# Altium PCB JacdacEdgeConnectorRef 101.PcbDoc
Units mm, origin at the board's own origin, x right, y up, seen from the top; angles counter-clockwise.
Board outline 11.95 x 12.12 mm, 2 copper layers (Top Layer, Bottom Layer), stack 1.901 mm thick; 1 components, 3 nets, 12 pads, 1 vias.
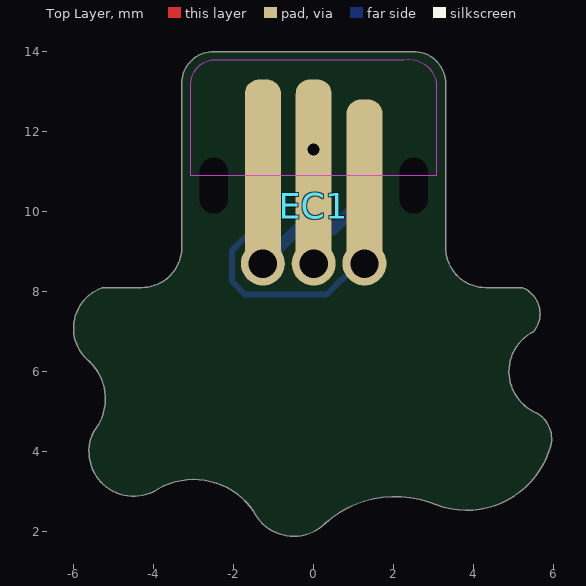
[diagram p0: Top Layer view]
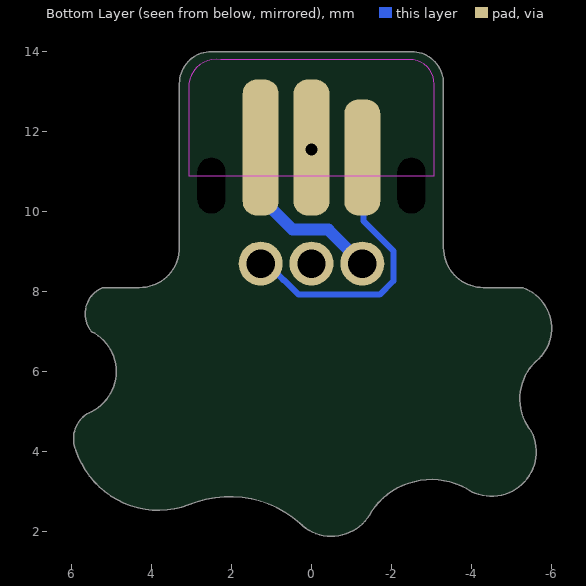
[diagram p1: Bottom Layer view, seen from below]

## Layer stack, top to bottom
Top Solder: solder mask 0.0102, Solder Resist, Dk 3.5
Top Layer: signal copper 0.0356
Dielectric 1: core 1.83, FR-4, Dk 4.2
Bottom Layer: signal copper 0.0356
Bottom Solder: solder mask 0.0102, Solder Resist, Dk 3.5

## Board outline
-5.5,4.5 ccw(c-6.498,5.318) -5.679,6.316 cw(c-4.933,7.083) -5.296,8.09 -5.3,8.1 -4.3,8.1 ccw(c-4.3,9.1) -3.3,9.1 -3.3,9.098 -3.3,13.2 cw(c-2.5,13.2) -2.5,14 2.5,14 cw(c2.5,13.2) 3.3,13.2 3.3,9.098 3.3,9.1 ccw(c4.3,9.1) 4.3,8.1 5.223,8.1 cw(c4.948,7.445) 5.501,6.999 5.5,7 ccw(c6,6) 5.5,5 cw(c5.213,4.323) 5.891,4.036 cw(c3.821,4.71) 3.071,2.667 ccw(c2.041,0.25) 0.291,2.209 cw(c-0.5,3) -1.5,2.5 ccw(c-3,1.5) -4,3 cw(c-4.5,4)

## Design rules (kind name [scope] priority, off if disabled: settings)
AssemblyTestPointUsage [All] p1: valid=2
BoardOutlineClearance [not (HasFootprint('MOUSEBITE_CONNECTOR_3X2') or HasFootprint('MOUSEBITE_NOCONNECTOR_3'))] p1: gap=0.3 ignorepadtopadclearanceinfootprint=FALSE except(0: Arc-SplitContinuation Track-SplitContinuation SMDPad-SplitContinuation THPad-SplitContinuation Via-SplitContinuation Fill-SplitContinuation Poly-SplitContinuation Text-OutlineEdge Text-CavityEdge Text-CutoutEdge Text-SplitBarrior Text-SplitContinuation; 0.15: Region-OutlineEdge Region-CavityEdge Region-CutoutEdge Region-SplitBarrior Region-SplitContinuation)
Clearance [not (IsPad and HasFootprint('MOUSEBITE_CONNECTOR_3X2'))] p1: gap=0.15 ignorepadtopadclearanceinfootprint=FALSE except(0.254: Arc-Hole Track-Hole SMDPad-Hole THPad-Hole Via-Hole Fill-Hole Poly-Hole Region-Hole Text-Hole)
ComponentClearance [All] p1: gap=0.01 collisioncheckmode=3 verticalgap=0.2 showdistances=FALSE
DiffPairsRouting [All] p1: maxlimit=2 minlimit=0.15 mostfreqgap=0.15 toplayer_minwidth=0.15 toplayer_maxwidth=2 toplayer_prefwidth=0.15 bottomlayer_minwidth=0.15 bottomlayer_maxwidth=2 bottomlayer_prefwidth=0.15 maxuncoupledlength=25
FabricationTestPointUsage [All] p1: valid=2 allowmultiple=FALSE
HoleSize [All] p1: absolutevalues=TRUE maxlimit=5 minlimit=0.3 maxpercent=80.000 minpercent=20.000
HoleToHoleClearance [IsPad and not (HasFootprint('MOUSEBITE_CONNECTOR_3X2') or HasFootprint('MOUSEBITE_NOCONNECTOR_3')) vs IsPad and not  (HasFootprint('MOUSEBITE_CONNECTOR_3X2') or HasFootprint('MOUSEBITE_NOCONNECTOR_3'))] p1: gap=0.5 allowstackedmicrovias=TRUE
MinimumAnnularRing [All] p1: minimumring=0.15
MinimumSolderMaskSliver [All] p1: minsoldermaskwidth=0.005
PlaneClearance [All] p1: clearance=0.3
PlaneConnect [All] p1: planeconnectstyle=Relief reliefexpansion=0.5 reliefentries=4 reliefconductorwidth=0.2 reliefairgap=0.3
PolygonConnect "PolygonConnect GND" [isVIA] p1: connectstyle=Relief reliefconductorwidth=0.2 reliefentries=4 polygonreliefangle="90 Angle" airgapwidth=0.2
PolygonConnect [All] p2: connectstyle=Relief reliefconductorwidth=0.2 reliefentries=4 polygonreliefangle="90 Angle" airgapwidth=0.2
RoutingVias [All] p1: holewidth=0.3 width=0.6 viastyle="Through Hole" minholewidth=0.3 minwidth=0.6 maxholewidth=0.3 maxwidth=0.8
SilkToSilkClearance [All] p1: silktosilkclearance=0.001
SilkToSolderMaskClearance [IsPad] p1: minsilkscreentomaskgap=0.05 clearancetoexposedcopper=TRUE
SolderMaskExpansion [All] p1: expansion=0.075 istentingtop=FALSE
UnRoutedNet [All] p1: checkbadconnections=TRUE
Width [All] p1: maxlimit=2 minlimit=0.15 preferedwidth=0.15 minimp=50.000000 maximp=50.000000 favimp=50.000000
18 further rules are at their usual default settings.

## Components (designator, comment, footprint, x,y, rotation, side; value= is the part's Value field where it differs from the comment)
EC1 "Jacdac edge connector" JACDAC_EDGE_CONNECTOR_NO_TRACES 0,8.15 r0 top

## Footprints (in the part's own frame and the unit in brackets; to place one, negate y for a bottom-side part, rotate by r counter-clockwise, add the part's x,y. Pads: shape width x height; smd on the part's side, far side on the other; paste and mask are expansions set on the pad)
JACDAC_EDGE_CONNECTOR_NO_TRACES [mm] "Jacdac 3 pin connector with no traces"
  rrect78% 0.9x2.9 smd far side paste-1 mask+0: 1(-1.27,3.2)
  round 1.1 hole 0.71 paste-0.254 mask+0: 1(1.27,0.55) 2(0,0.55) 3(-1.27,0.55)
  rrect78% 0.9x4.3 smd paste-1 mask+0: 1(1.27,2.5)
  rrect78% 0.9x4.8 smd paste-1 mask+0: 2(0,2.75) 3(-1.27,2.75)
  rrect78% 0.9x3.4 smd far side paste-1 mask+0: 2(0,3.45) 2(0,3.45) 3(1.27,3.45)
  round 0 hole 0.7 slot 1.4 at 90 deg unplated: ""(-2.5,2.5) ""(2.5,2.5)
  Top Layer keep-out region: -3.075,2.75 -3.07,5.033 -2.987,5.341 -2.761,5.567 -2.453,5.65 -2.453,5.65 2.27,5.65 2.545,5.635 2.794,5.516 2.978,5.31 3.07,5.05 3.07,5.05 3.07,2.75
  Bottom Layer lines w0.2: -1.27,0.85 -1.126,0.85
  Bottom Layer keep-out region: -3.07,2.75 -3.07,5.033 -3.023,5.269 -2.889,5.469 -2.689,5.603 -2.453,5.65 -2.453,5.65 2.27,5.65 2.546,5.635 2.794,5.516 2.978,5.31 3.07,5.05 3.07,5.05 3.07,2.75

## Part data
EC1: "3 pin Jacdac edge connector 1.27mm pitch", Manufacturer Part Number=JACDAC_EDGE_CONNECTOR, Checked By=?, ComponentLink1Description="Yuliang JACDAC cable connector drawing online", ComponentLink1URL=https://github.com/microsoft/jacdac-mdk/blob/main/connector/JACDAC-Connector-by-Yuliang-2020-11-28.pdf, ComponentLink2Description="JACDAC PCB edge connector spec onlin", ComponentLink2URL=https://github.com/microsoft/jacdac-mdk/blob/main/connector/JACDAC_PCB_Edge_Connector_Drawing_JD-PEC-01_rev_01.pdf, Created By="D. Gakure", PCB Type="1.6mm FR4"

## Via types
v1: diameter 0.6, hole 0.3, Top Layer to Bottom Layer, tented both sides, 1 vias

## Nets (pads, with @x,y where several pads share a name; then routed paths per layer and width w, separated by ;. In a path a pad name is that pad's centre, name@x,y a point inside that pad or via, vN(x,y) a via of type N, cw(c..) or ccw(c..) an arc to the next point about the centre after c; other vN are vias at no path point)
GND: EC1.2
  other v1: 0,11.55
JD_DATA: EC1.1 | length 7.4
  Bottom Layer w0.15: EC1.1@-1.27,11.6 -1.303,11.567 -1.303,9.763 -2.045,9.021 -2.045,8.264 -1.706,7.925 0.321,7.925 0.689,8.293 0.707,8.293 1.114,8.7 EC1.1@1.27,8.7
JD_PWR: EC1.3 | length 3.2
  Bottom Layer w0.3: EC1.3@-1.27,8.7 -0.42,9.55 0.47,9.55 EC1.3@1.27,10.35
pads on no net: EC1.

## Polygon pours and split planes (outlines as drawn)
no net on Bottom Assy "NONET_L-01_P-001" (hatched 45Degree grid 0.5 track 0.01): 3.3,9.1 ccw(c4.3,9.1) 4.3,8.1 ccw(c4.3,9.1) 5.3,9.1 5.3,9.098 5.3,14.2 3.3,14.2
no net on Bottom Assy "NONET_L-01_P-001" (hatched 45Degree grid 0.5 track 0.01): -5.3,9.1 ccw(c-4.3,9.1) -4.3,8.1 ccw(c-4.3,9.1) -3.3,9.1 -3.3,9.098 -3.3,14.2 -5.3,14.2

## Other copper
Top Layer:
  text "Top Layer" at 16.601,6.85 h1.7
Bottom Layer:
  text "Bottom Layer" at 16.6,5.35 h1.7

## Silkscreen, mask and mechanical layers (free items; w line width, h text height)
Top Overlay:
  text "Top Overlay" at 16.601,1.125 h1.7
Bottom Overlay:
  text "'.ProjectCodenameID'-'.ProjectRevision'" at 2.25,0.25 h0.8
  text "Bottom Overlay" at 16.6,-0.375 h1.7
Top Paste:
  text "Top Paste" at 16.601,-1.782 h1.7
Bottom Paste:
  text "Bottom Paste" at 16.6,-3.26 h1.7
Top Solder:
  text "Top Solder (resist)" at 16.601,-4.582 h1.7
Bottom Solder:
  text "Bottom Solder (resist)" at 16.6,-6.073 h1.7
Drill Guide:
  text "Drill Guide" at 26.025,2.615 h1.7
Dimension:
  text "Dimension" at 26.025,3.915 h1.7
Fabrication notes:
  lines w0.1: -13.6,8.422 40.3,8.429 ; -2.475,11.679 -1.875,12.279 3.52,12.279 ; 2.795,11.554 3.52,12.279 ; 23.32,12.279 8.15,12.279 3.52,12.279 ; 24.975,11.064 25.325,11.415 ; 25.325,8.436 25.325,11.415 ; 25.675,11.064 25.325,11.415
  text "non-plated slots x2" at 12.926,12.843 h1.7
  text "no board edge pips/ / rat's teeth/mouse bites  / above this line - make  / sure board edge is clean" at 26.325,9.001 h1.7
  text "Fabrication Notes" at 26.025,6.615 h1.7
Mechanical 9:
  lines w0.01: -13.4,-25.77 ccw(c-13.4,-23.445) -13.355,-25.77
Board Outline:
  lines w0.2: -5.3,8.1 -4.3,8.1 ccw(c-4.3,9.1) -3.3,9.1 ; -5.296,8.09 ccw(c-4.933,7.083) -5.679,6.316 cw(c-6.498,5.318) -5.5,4.5 ccw(c-4.5,4) -4,3 cw(c-3,1.5) -1.5,2.5 ccw(c-0.5,3) 0.291,2.209 cw(c2.041,0.25) 3.071,2.667 ccw(c3.821,4.71) 5.891,4.036 ccw(c5.213,4.323) 5.5,5 cw(c6,6) 5.5,7 ; -3.3,9.098 -3.3,13.2 cw(c-2.5,13.2) -2.5,14 2.5,14 cw(c2.5,13.2) 3.3,13.2 3.3,9.098 ; 3.3,9.1 ccw(c4.3,9.1) 4.3,8.1 5.223,8.1 cw(c4.948,7.445) 5.501,6.999
  text "Board Outline" at 26.025,5.315 h1.7
Top Assy:
  text "Top Assy" at 16.601,4.025 h1.7
Bottom Assy:
  text "Bottom Assy" at 16.6,2.625 h1.7
Drill Drawing:
  text "Drill Drawing" at 26.025,1.11 h1.7
Component Keepout Dwg:
  lines w0.01: -5.3,14.2 -3.3,14.2 ; 3.3,14.2 5.3,14.2
  lines w0.2: -5.3,9.098 -5.3,14.2 ; -5.3,9.1 ccw(c-4.3,9.1) -4.3,8.1 ccw(c-4.3,9.1) -3.3,9.1 ; -3.3,9.098 -3.3,14.2 ; 3.3,9.098 3.3,14.2 ; 3.3,9.1 ccw(c4.3,9.1) 4.3,8.1 ccw(c4.3,9.1) 5.3,9.1 ; 5.3,9.098 5.3,14.2

## Text inside footprints (layer, text, board x,y; h text height)
EC1: Mechanical 9 "Jacdac / cable connector  / body" at -4.821,18.158 h1.7